# EAGLE board eRIC Arduino Shield (EAGLE 7.0.0)
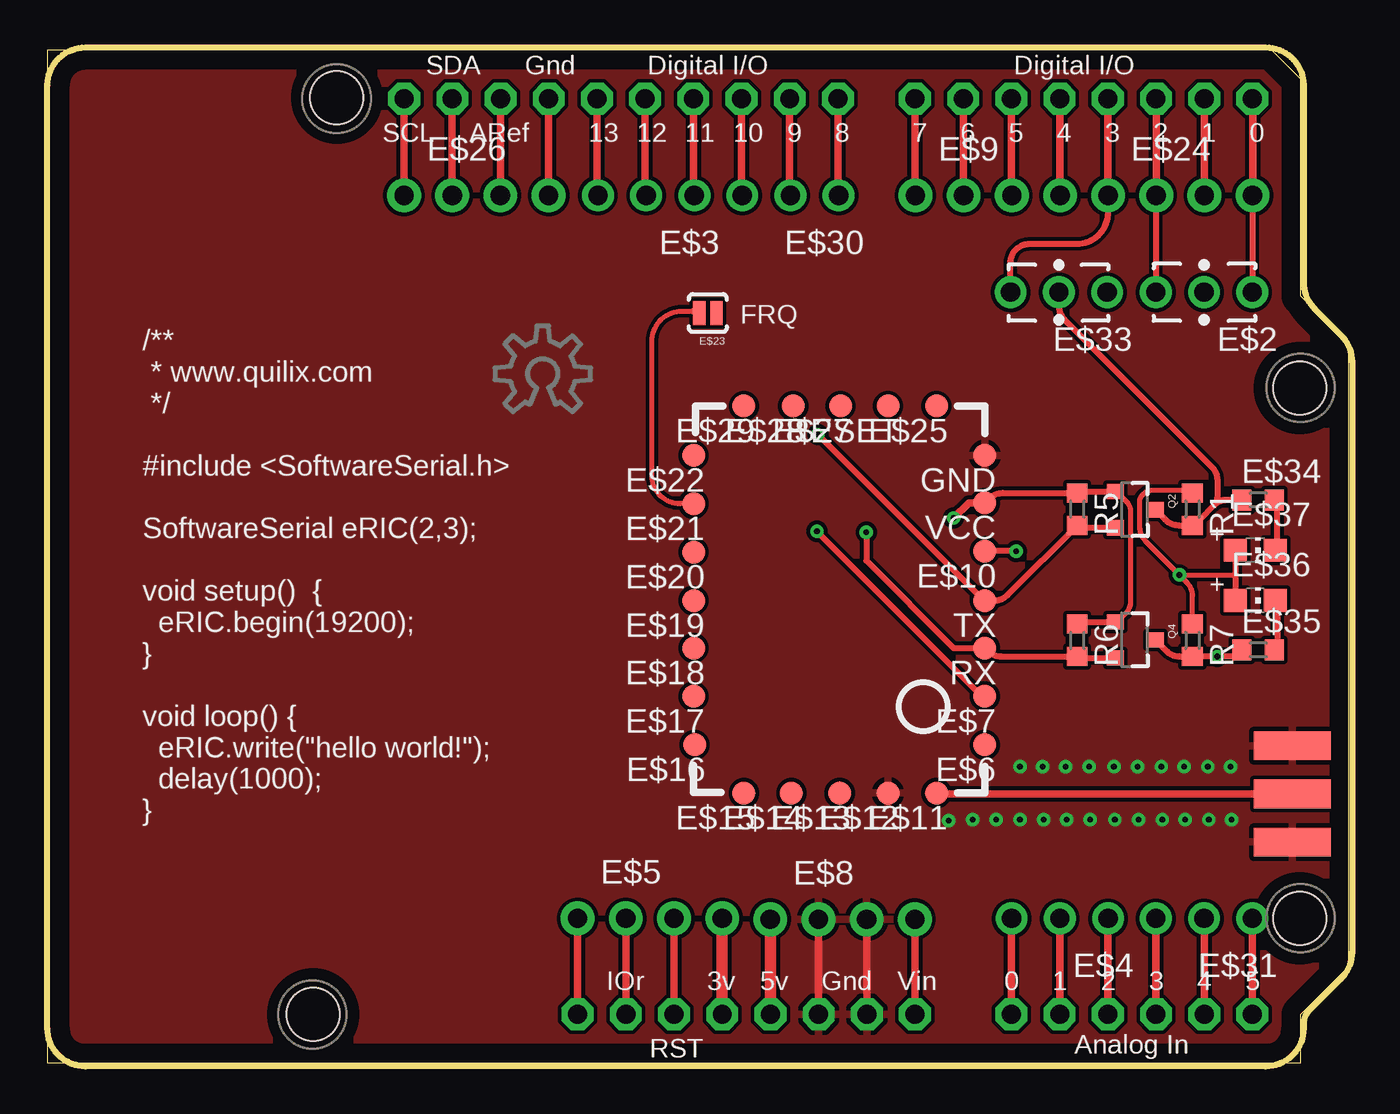
[diagram p0: board, top side]
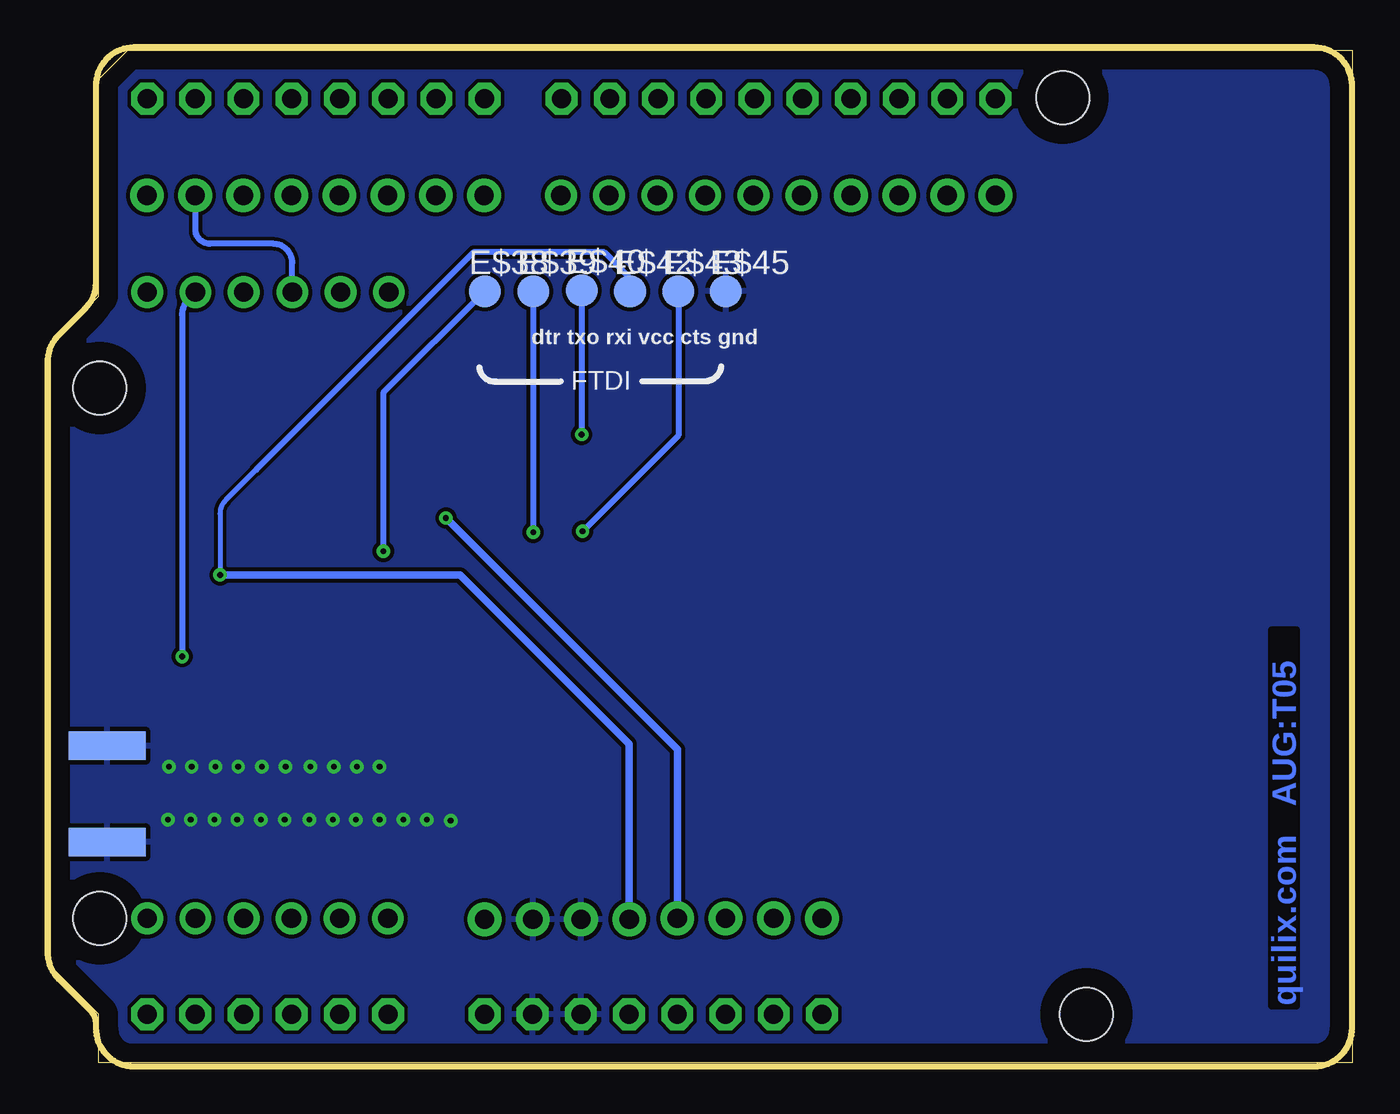
[diagram p1: board, bottom side, seen from below]

Size 68.75 x 53.7 mm. Coordinates in mm from the lower left corner, seen from the top.
Outline: 66.2,2.24 66.2,2 arc-90 64.2,0 2,0 arc-90 0,2 0,51.7 arc-90 2,53.7 64.2,53.7 arc-90 66.2,51.7 66.2,41.33 arc45 66.79,39.91 68.16,38.54 arc-45 68.75,37.12 68.75,6.03 arc-45 68.16,4.61 66.44,2.89 arc45 66.2,2.24
Copper layers (1*16): Top 0.035mm / dielectric 1.5mm / Bottom 0.035mm
Design rules "default *": minimum track width 10mil, minimum drill 24mil, track to track 8mil, track to pad 8mil, pad to pad 8mil, via to via 8mil, smd to smd 8mil, copper to edge 40mil, drill to drill 8mil, minimum pad ring 10mil, minimum via ring 8mil, stop-mask expansion 4mil, vias tented up to drill 0.3mm, thermal gap 10mil
Holes 2.8 mm at 14,2.75 66,7.8 66,35.75 15.25,51.05

## Footprints (pad centres in the part's own frame; a part is rotated, then mirrored left to right if it is on the bottom)
ARDUINOR3 = drill 1 pad 1.676 octagon: 3V 35.56,2.54; 5V 38.1,2.54; A0 50.8,2.54; A1 53.34,2.54; A2 55.88,2.54; A3 58.42,2.54; A4 60.96,2.54; A5 63.5,2.54; AREF 23.876,50.8; D0 63.5,50.8; D1 60.96,50.8; D2 58.42,50.8; D3 55.88,50.8; D4 53.34,50.8; D5 50.8,50.8; D6 48.26,50.8; D7 45.72,50.8; D8 41.656,50.8; D9 39.116,50.8; D10 36.576,50.8; D11 34.036,50.8; D12 31.496,50.8; D13 28.956,50.8; GND 26.416,50.8; GND1 43.18,2.54; GND2 40.64,2.54; IOREF 30.48,2.54; RESERVED 27.94,2.54; RESET 33.02,2.54; SCL 18.796,50.8; SDA 21.336,50.8; VIN 45.72,2.54
1X03-CLEANBIG = drill 1.016 pad 1.676: 1 -2.54,0; 2 0,0; 3 2.54,0
1X04-CLEANBIG = drill 1.016 pad 1.778: 1 -3.81,0; 2 -1.27,0; 3 1.27,0; 4 3.81,0
TP12R = smd 1.2 x 1.2: TP 0,0
SJ_2S-NO = smd 0.635 x 1.27: 1 -0.45,0; 2 0.45,0
R0603 = smd 1 x 1.1: 1 -0.85,0; 2 0.85,0
CHIP-LED0805 = smd 1.2 x 1.2: A 0,-1.05; C 0,1.05
TP17R = smd 1.7 x 1.7: TP 0,0
SMA-EDGE = smd 1.524 x 4.064: GND@0 0,0; GND@1 5.08,0; SIG 2.54,0 | smd 1.524 x 4.064 bottom: GND@2 0,0; GND@3 5.08,0
SOT23-3 = smd 0.8 x 0.9: 1 -0.95,-1; 2 0.95,-1; 3 0,1.1

## Placement (x,y rotation side)
E$1  [ARDUINOR3]  0,0.2 0 top
E$2  [1X03-CLEANBIG]  60.95,40.8 180 top
E$3  [1X03-CLEANBIG]  31.55,45.9 180 top
E$4  [1X03-CLEANBIG]  53.35,7.8 180 top
E$5  [1X04-CLEANBIG]  31.75,7.8 0 top
E$6  [TP12R]  49.4,16.95 180 top
E$7  [TP12R]  49.4,19.5 180 top
E$8  [1X04-CLEANBIG]  41.9,7.75 0 top
E$9  [1X04-CLEANBIG]  49.55,45.9 0 top
E$10  [TP12R]  49.4,27.15 180 top
E$11  [TP12R]  46.85,14.4 180 top
E$12  [TP12R]  44.3,14.4 180 top
E$13  [TP12R]  41.75,14.4 180 top
E$14  [TP12R]  39.2,14.4 180 top
E$15  [TP12R]  36.7,14.4 180 top
E$16  [TP12R]  34.1,16.95 180 top
E$17  [TP12R]  34.05,19.5 180 top
E$18  [TP12R]  34.05,22.05 180 top
E$19  [TP12R]  34.05,24.55 180 top
E$20  [TP12R]  34.05,27.1 180 top
E$21  [TP12R]  34.05,29.65 180 top
E$22  [TP12R]  34.05,32.2 180 top
E$23  [SJ_2S-NO]  34.8,39.7 180 top
E$24  [1X04-CLEANBIG]  59.7,45.9 0 top
E$25  [TP12R]  46.85,34.8 180 top
E$26  [1X04-CLEANBIG]  22.6,45.9 0 top
E$27  [TP12R]  41.8,34.8 180 top
E$28  [TP12R]  39.3,34.8 180 top
E$29  [TP12R]  36.7,34.8 180 top
E$30  [1X03-CLEANBIG]  39.15,45.9 180 top
E$31  [1X03-CLEANBIG]  60.95,7.8 180 top
E$33  [1X03-CLEANBIG]  53.3,40.8 180 top
E$34  [R0603]  63.8,29.85 0 top
E$35  [R0603]  63.8,21.95 0 top
E$36  [CHIP-LED0805]  63.65,24.55 270 top
E$37  [CHIP-LED0805]  63.65,27.2 270 top
E$38  [TP17R]  45.7,40.85 0 bottom
E$39  [TP17R]  43.15,40.85 0 bottom
E$40  [TP17R]  40.6,40.9 0 bottom
E$41  [OSHWLOGO_TOL_0.2]  26.1,36.5 0 top
E$42  [TP17R]  38.05,40.85 0 bottom
E$43  [TP17R]  35.5,40.85 0 bottom
E$44  [SMA-EDGE]  65.6,16.9 270 top
E$45  [TP17R]  33,40.85 0 bottom
GND  [TP12R]  49.4,32.2 180 top
Q2  BSS138  [SOT23-3]  57.28,29.34 270 top
Q4  BSS138  [SOT23-3]  57.28,22.48 270 top
R1  10K  [R0603]  60.34,29.37 270 top
R5  10K  [R0603]  54.26,29.37 270 top
R6  10K  [R0603]  54.26,22.46 270 top
R7  10K  [R0603]  60.34,22.46 270 top
RESET  [TP12R]  44.3,34.8 180 top
RX  [TP12R]  49.4,22.05 180 top
TX  [TP12R]  49.4,24.55 180 top
VCC  [TP12R]  49.4,29.7 180 top

## Library data of the parts
E$1-E$5 E$8 E$9 E$24 E$26 E$30 E$31 E$33-E$37 E$41 R1 R5-R7 = adafruit
E$6 E$7 E$10-E$22 E$25 E$27-E$29 E$38-E$40 E$42 E$43 E$45 GND RESET RX TX VCC = testpad
E$23 = SparkFun-Capacitors
E$44 = SparkFun-Connectors
Q2 Q4 = SparkFun

## Nets
ANT: E$11.TP E$44.SIG
GND: E$1.GND1 E$1.GND2 E$8.2 E$8.3 E$12.TP E$44.GND@0 E$44.GND@1 E$44.GND@2 E$44.GND@3 E$45.TP GND.TP
HV: E$1.5V E$8.1 E$36.A E$37.A E$42.TP R1.1 R7.1
LV: E$1.3V E$5.4 Q2.1 Q4.1 R5.1 R6.1 VCC.TP
S$1: E$21.TP E$23.2
S$3: E$7.TP E$43.TP
S$4: E$1.RESERVED E$5.1
S$5: E$1.IOREF E$5.2
S$6: E$10.TP E$38.TP
S$7: E$39.TP Q4.2 R6.2 RX.TP
S$9: E$1.RESET E$5.3
S$10: E$2.2 E$35.1 Q4.3 R7.2
S$11: E$19.TP
S$12: E$33.2 E$34.1 Q2.3 R1.2
S$13: E$35.2 E$36.C
S$16: E$1.VIN E$8.4
S$17: E$1.A0 E$4.3
S$18: E$25.TP
S$19: E$1.A1 E$4.2
S$20: E$1.A2 E$4.1
S$21: E$1.A3 E$31.3
S$22: E$1.A4 E$31.2
S$23: E$1.A5 E$31.1
S$24: E$1.SCL E$26.1
S$25: E$1.SDA E$26.2
S$26: E$1.AREF E$26.3
S$27: E$1.GND E$26.4
S$28: E$1.D13 E$3.3
S$29: E$1.D12 E$3.2
S$30: E$1.D11 E$3.1
S$31: E$1.D10 E$30.3
S$32: E$1.D9 E$30.2
S$33: E$1.D8 E$30.1
S$34: E$1.D7 E$9.1
S$35: E$1.D6 E$9.2
S$36: E$1.D5 E$9.3
S$37: E$1.D4 E$9.4
S$38: E$1.D3 E$24.1 E$33.3
S$39: E$1.D2 E$2.3 E$24.2
S$40: E$1.D1 E$24.3 E$33.1
S$41: E$1.D0 E$2.1 E$24.4
S$43: E$34.2 E$37.C
S$48: E$40.TP Q2.2 R5.2 TX.TP

## Tracks (layer width: path | path; a pad name or v marks a point on that pad's centre or on a via)
ANT
  Top 0.406: E$11.TP arc45 46.95,14.36 E$44.SIG
GND  (via drill 0.3)
  Top 0.406: E$1.GND1 E$8.3 | E$1.GND2 E$8.2
  other vias: 56.2,15.8 57.45,15.8 58.7,15.8 59.9,15.8 61.15,15.8 62.35,15.8 56.25,13 57.5,13 58.75,13 59.95,13 61.2,13 62.4,13 48.75,13 51.25,15.8 52.45,15.8 53.65,15.8 54.9,15.8 50,13 51.25,13 52.5,13 53.7,13 54.95,13 47.5,12.95
  pour Top: -0.35,53.85 68.9,53.85 68.9,-0.1 -0.4,-0.1
  pour Bottom: -0.45,54.1 68.85,54.1 68.65,-0.4 -0.65,-0.4
HV  (via drill 0.3)
  Top 0.254: 60.01,30.25 R1.1 | 59.91,30.35 58.22,30.35 arc45 57.79,30.19 arc45 57.55,29.84 57.55,28.51 arc45 57.84,27.71 v59.65,25.9 | v59.65,25.9 62.6,25.9 | R7.1 60.34,24.79 arc45 60.05,25.5 v59.65,25.9
  Top 0.305: 60.01,30.25 59.91,30.35 | E$37.A 62.6,25.9 E$36.A
  Top 0.406: R1.1
  Top 0.61: E$1.5V E$8.1 arc90 E$8.1
  Bottom 0.254: E$42.TP 38.05,41.55 | 57.75,31.45 59.36,29.84 arc-45 59.65,29.14 v59.65,25.9
  Bottom 0.305: 38.05,41.55 39.4,42.9 46.3,42.9 57.75,31.45
  Bottom 0.406: E$8.1 38.1,17 47,25.9 v59.65,25.9
LV  (via drill 0.3)
  Top 0.254: 56.48,30.22 56.3,30.32 56.86,29.76 arc-45 57.08,29.31 57.08,24.51 arc-45 56.76,23.81 56.38,23.43
  Top 0.305: Q2.1 54.34,30.29 R5.1 50.33,30.22 arc45 49.62,29.92 VCC.TP | R6.1 54.29,23.43 Q4.1 56.38,23.43
  Top 0.406: 56.3,30.32 Q2.1 | 56.15,23.31 Q4.1 | v47.75,28.9 48.55,29.7 VCC.TP
  Top 0.61: E$1.3V E$5.4
  Bottom 0.406: E$5.4 arc90 E$5.4 35.56,16.71 v47.75,28.9
S$1
  Top 0.254: E$21.TP 33.35,29.65 arc-90 31.85,31.15 31.85,38.2 arc-90 33.45,39.8 34,39.8
  Top 0.305: 34,39.8 arc-90 E$23.2
S$3  (via drill 0.3)
  Top 0.254: 49.25,19.5 E$7.TP
  Top 0.305: v40.55,28.2 49.25,19.5
  Bottom 0.305: E$43.TP 35.5,33.25 v40.55,28.2
S$4
  Top 0.406: E$1.RESERVED E$5.1
S$5
  Top 0.406: E$1.IOREF E$5.2
S$6  (via drill 0.3)
  Top 0.305: v51.05,27.15 E$10.TP
  Bottom 0.305: E$38.TP 51.05,35.5 v51.05,27.15
S$7  (via drill 0.3)
  Top 0.305: Q4.2 54.33,21.53 R6.2 50.26,21.61 arc-45 49.55,21.9 RX.TP 47.75,22.05 43.15,26.65 v43.15,28.15
  Top 0.406: 56.2,21.61 Q4.2
  Bottom 0.305: E$39.TP v43.15,28.15
S$9
  Top 0.406: E$1.RESET E$5.3
S$10  (via drill 0.3)
  Top 0.305: Q4.3 58.96,21.9 arc45 59.66,21.61 R7.2 v61.65,21.61 | 62.61,21.61 v61.65,21.61 | v61.65,21.6 v61.65,21.61
  Top 0.406: E$35.1 62.61,21.61
  Bottom 0.305: E$2.2 61.36,40.39 arc-45 61.65,39.59 v61.65,21.6
S$12
  Top 0.305: Q2.3 58.91,28.81 arc45 59.61,28.52 R1.2 60.75,28.85 61.47,29.57 | E$33.2 53.3,40.06 arc45 53.59,39.36 61.36,31.59 arc-45 61.65,30.89 61.65,30 arc-45 61.47,29.57 | E$34.1 62.14,29.85 arc45 61.47,29.57
S$13
  Top 0.305: E$36.C arc-90 64.8,24.8 64.8,22.1 E$35.2
S$16
  Top 0.406: E$1.VIN E$8.4
S$17
  Top 0.406: E$1.A0 E$4.3
S$19
  Top 0.406: E$1.A1 E$4.2
S$20
  Top 0.406: E$1.A2 E$4.1
S$21
  Top 0.406: E$1.A3 E$31.3
S$22
  Top 0.406: E$1.A4 E$31.2
S$23
  Top 0.406: E$1.A5 E$31.1
S$24
  Top 0.406: E$1.SCL E$26.1
S$25
  Top 0.406: E$1.SDA E$26.2
S$26
  Top 0.406: E$1.AREF E$26.3
S$27
  Top 0.406: E$1.GND E$26.4
S$28
  Top 0.406: E$1.D13 28.96,45.95 E$3.3
S$29
  Top 0.406: E$1.D12 31.5,45.95 E$3.2
S$30
  Top 0.406: E$1.D11 34.04,45.95 E$3.1
S$31
  Top 0.406: E$1.D10 36.58,45.93 E$30.3
S$32
  Top 0.406: E$1.D9 39.12,45.93 E$30.2
S$33
  Top 0.406: E$1.D8 41.66,45.93 E$30.1
S$34
  Top 0.406: E$1.D7 45.72,45.92 E$9.1
S$35
  Top 0.406: E$1.D6 48.26,45.92 E$9.2
S$36
  Top 0.406: E$1.D5 50.8,45.92 E$9.3
S$37
  Top 0.406: E$1.D4 53.34,45.92 E$9.4
S$38
  Top 0.305: 50.75,40.82 50.75,42.35 arc-90 51.75,43.35 54.25,43.35 arc90 55.9,45 E$24.1
  Top 0.406: E$1.D3 E$24.1 arc-90 E$24.1 | E$33.3 arc-45 50.75,40.82
S$39
  Top 0.305: 58.41,45.9 E$2.3
  Top 0.406: E$1.D2 E$24.2 58.41,45.9
S$40
  Top 0.406: E$1.D1 60.96,45.92 arc45 E$24.3
  Bottom 0.305: E$33.1 55.85,42.35 arc-90 56.85,43.35 60.2,43.35 arc90 60.95,44.15 60.95,45.95
  Bottom 0.406: 60.95,45.95 arc-90 60.97,45.93 E$24.3 | E$33.1 55.87,40.8 55.87,40.78 arc90 E$33.1
S$41
  Top 0.305: 63.49,45.9 E$2.1
  Top 0.406: E$1.D0 E$24.4 63.49,45.9
S$43
  Top 0.305: E$37.C arc90 64.8,27.1 64.8,29.7 E$34.2
S$48  (via drill 0.3)
  Top 0.254: 49.35,24.55 TX.TP
  Top 0.305: Q2.2 54.28,28.39 R5.2 50.59,24.84 arc-45 49.88,24.55 TX.TP | v40.6,33.3 49.35,24.55
  Top 0.406: 56.15,28.52 Q2.2
  Bottom 0.305: E$40.TP v40.6,33.3

## Text on the board
Bottom: quilix.com AUG:T05
_tsilk: FRQ | /** / * www.quilix.com / */ / / #include <SoftwareSerial.h> / / SoftwareSerial eRIC(2,3); / / void setup() { / eRIC.begin(19200); / } / / void loop() { / eRIC.write("hello world!"); / delay(1000); / }
_bsilk: dtr txo rxi vcc cts gnd | FTDI